# EAGLE board 12VAttinyDischargeChecker-A2 (EAGLE 8.5.2)

Size 100.33 x 70 mm. Coordinates in mm from the lower left corner, seen from the top.
Outline: 0,69.85 0,0 100.33,0 100.33,69.85
Outline: 0,69.85 0,70
Outline: 0,69.85 100,69.85
Copper layers (1*16): Top 0.035mm / dielectric 1.5mm / Bottom 0.035mm
Design rules "default": minimum track width 10mil, minimum drill 24mil, track to track 8mil, track to pad 8mil, pad to pad 8mil, via to via 8mil, smd to smd 8mil, copper to edge 40mil, drill to drill 8mil, minimum pad ring 10mil, minimum via ring 8mil, stop-mask expansion 4mil, vias tented up to drill 0mil, thermal gap 10mil

## Footprints (pad centres in the part's own frame; a part is rotated, then mirrored left to right if it is on the bottom)
0204/7 = drill 0.813 octagon: 1 -3.81,0; 2 3.81,0
DIL08 = drill 0.813 long: 1 -3.81,-3.81; 2 -1.27,-3.81; 3 1.27,-3.81; 4 3.81,-3.81; 5 3.81,3.81; 6 1.27,3.81; 7 -1.27,3.81; 8 -3.81,3.81
DIL28-3 = drill 0.813 long: 1 -16.51,-3.81; 2 -13.97,-3.81; 3 -11.43,-3.81; 4 -8.89,-3.81; 5 -6.35,-3.81; 6 -3.81,-3.81; 7 -1.27,-3.81; 8 1.27,-3.81; 9 3.81,-3.81; 10 6.35,-3.81; 11 8.89,-3.81; 12 11.43,-3.81; 13 13.97,-3.81; 14 16.51,-3.81; 15 16.51,3.81; 16 13.97,3.81; 17 11.43,3.81; 18 8.89,3.81; 19 6.35,3.81; 20 3.81,3.81; 21 1.27,3.81; 22 -1.27,3.81; 23 -3.81,3.81; 24 -6.35,3.81; 25 -8.89,3.81; 26 -11.43,3.81; 27 -13.97,3.81; 28 -16.51,3.81
MA04-1 = drill 1.016 long: 1 -3.81,0; 2 -1.27,0; 3 1.27,0; 4 3.81,0
TO92- = drill 0.813 long: 1 2.54,0; 2 0,0; 3 -2.54,0
1X01/90 = drill 1.016 long: 1 -1.27,-3.81
E5-8,5 = drill 1.016 pad 2.54: + -2.54,0 | drill 1.016 pad 2.54 octagon: - 2.54,0
MA06-1 = drill 1.016 long: 1 -6.35,0; 2 -3.81,0; 3 -1.27,0; 4 1.27,0; 5 3.81,0; 6 6.35,0
W237-132 = drill 1.194 long: 1 -2.54,-0.635; 2 2.54,-0.635
RS-2,5 = drill 0.813 pad 1.6 octagon: 1 -1.27,0; 2 1.27,0
2X02/90 = drill 1.016 octagon: 1 -1.27,-6.35; 2 -1.27,-3.81; 3 1.27,-6.35; 4 1.27,-3.81
WIRELESS-TX-FLAT = drill 0.8 long: P$1 0.635,-6.35; P$2 -1.905,-6.35; P$3 3.175,-6.35
P1-17Y = drill 1.702 pad 2.121 long: TP 0,0
MA03-1 = drill 1.016 long: 1 -2.54,0; 2 0,0; 3 2.54,0
PAK100/2500-10 = drill 1 pad 1.422: 1 -5.08,-1.27; 2 -5.08,1.27; 3 -2.54,-1.27; 4 -2.54,1.27; 5 0,-1.27; 6 0,1.27; 7 2.54,-1.27; 8 2.54,1.27; 9 5.08,-1.27; 10 5.08,1.27

## Placement (x,y rotation side)
E$1  [0204/7]  44.13,34.29 270 top
E$2  [DIL08]  6.35,5.71 270 top
E$3  [DIL28-3]  24.13,34.92 0 top
E$4  [DIL28-3]  24.13,48.26 0 top
E$5  [DIL28-3]  24.13,60.96 0 top
E$6  [DIL28-3]  77.47,60.96 180 top
E$7  [DIL28-3]  77.47,47.62 180 top
E$8  [MA04-1]  2.86,31.43 90 top
E$9  [MA04-1]  98.11,37.47 90 top
E$10  [0204/7]  47.94,34.29 270 top
E$11  [0204/7]  43.81,46.35 270 top
E$12  [0204/7]  47.62,46.35 270 top
E$13  [0204/7]  47.62,62.87 270 top
E$14  [0204/7]  43.81,62.87 270 top
E$15  [0204/7]  53.34,62.87 90 top
E$16  [0204/7]  57.15,62.87 90 top
E$17  [0204/7]  113.03,25.4 90 top  (outside the outline)
E$18  [TO92-]  104.14,55.88 90 top  (outside the outline)
E$19  [0204/7]  53.34,46.35 90 top
E$20  [0204/7]  57.15,46.35 90 top
E$21  [0204/7]  53.66,34.29 90 top
E$22  [1X01/90]  111.12,39.37 180 top  (outside the outline)
E$23  [E5-8,5]  106.05,25.4 270 top  (outside the outline)
E$24  [MA06-1]  2.96,44.87 90 top
E$25  [0204/7]  57.47,34.29 90 top
E$26  [MA04-1]  98.11,47.62 90 top
E$27  [DIL28-3]  77.47,34.92 180 top
E$28  [MA06-1]  117.58,15.98 90 top  (outside the outline)
E$29  [W237-132]  105.73,66.04 180 top
E$30  [RS-2,5]  113.03,50.8 90 top  (outside the outline)
E$31  [2X02/90]  108.78,51.77 180 top  (outside the outline)
E$32  [WIRELESS-TX-FLAT]  20.32,10.79 270 top
E$33  [P1-17Y]  33.97,26.04 0 top
E$34  [P1-17Y]  41.59,26.04 0 top
E$35  [MA04-1]  109.54,14.92 90 top  (outside the outline)
E$36  [P1-17Y]  33.97,8.26 0 top
E$37  [P1-17Y]  41.59,8.26 0 top
E$38  [MA06-1]  2.96,60.75 90 top
E$39  [P1-17Y]  45.09,26.04 0 top
E$40  [MA06-1]  98,60.54 270 top
E$41  [MA06-1]  103.72,44.03 270 top  (outside the outline)
E$42  [P1-17Y]  52.7,26.04 0 top
E$43  [P1-17Y]  45.09,8.26 0 top
E$44  [P1-17Y]  107.95,39.37 0 top  (outside the outline)
E$45  [P1-17Y]  52.7,8.26 0 top
E$46  [MA03-1]  38.1,3.49 0 top
E$47  [MA03-1]  48.9,3.49 0 top
E$48  [MA03-1]  60.01,3.17 0 top
E$49  [MA03-1]  71.12,3.49 0 top
E$50  [MA03-1]  81.92,3.17 0 top
E$51  [MA03-1]  93.03,3.49 0 top
E$52  [P1-17Y]  56.2,26.04 0 top
E$53  [P1-17Y]  63.82,26.04 0 top
E$54  [P1-17Y]  56.2,8.26 0 top
E$55  [P1-17Y]  63.82,8.26 0 top
E$56  [P1-17Y]  67.31,26.04 0 top
E$57  [P1-17Y]  74.93,26.04 0 top
E$58  [P1-17Y]  67.31,8.26 0 top
E$59  [P1-17Y]  74.93,8.26 0 top
E$60  [P1-17Y]  78.42,26.04 0 top
E$61  [PAK100/2500-10]  110.49,3.81 0 top  (outside the outline)
E$62  [P1-17Y]  86.04,26.04 0 top
E$63  [P1-17Y]  78.42,8.26 0 top
E$64  [P1-17Y]  86.04,8.26 0 top
E$65  [P1-17Y]  89.53,26.04 0 top
E$66  [P1-17Y]  97.16,26.04 0 top
E$67  [P1-17Y]  89.53,8.26 0 top
E$68  [P1-17Y]  97.16,8.26 0 top

## Library data of the parts
E$1 E$10-E$17 E$19-E$21 E$25 = eagle-ltspice
E$2-E$7 E$27 = 74xx-us
E$8 E$9 E$24 E$26 E$28 E$35 E$38 E$40 E$41 E$46-E$51 = con-lstb
E$18 = transistor-fet
E$22 E$31 = pinhead
E$23 = ref-packages-longpad
E$29 = con-wago-508
E$30 = discrete
E$32 = LSGPackages
E$33 E$34 E$36 E$37 E$39 E$42-E$45 E$52-E$60 E$62-E$68 = testpad
E$61 = con-3m

## Nets
S$2: E$1.1 E$2.4 E$3.22 E$8.4 E$12.1 E$32.P$3 E$36.TP E$46.1
S$3: E$2.5 E$32.P$2
S$4: E$1.2 E$3.13 E$10.2
S$5: E$4.13 E$11.2 E$12.2
S$7: E$3.11 E$8.2
S$8: E$2.8 E$3.7 E$8.3 E$32.P$1 E$34.TP
S$9: E$3.12 E$8.1
S$10: E$10.1 E$37.TP E$46.3
S$12: E$4.7 E$24.1 E$53.TP
S$13: E$4.11 E$24.3
S$14: E$4.12 E$24.4
S$15: E$5.7 E$38.1
S$17: E$5.11 E$38.2
S$19: E$5.13 E$13.2 E$14.2
S$20: E$6.13 E$15.2 E$16.2
S$21: E$7.13 E$19.2 E$20.2
S$22: E$21.2 E$25.2 E$27.13
S$23: E$4.22 E$11.1 E$13.1 E$24.6
S$24: E$5.22 E$14.1 E$15.1 E$38.6
S$25: E$6.22 E$16.1 E$19.1 E$40.6
S$26: E$7.22 E$20.1 E$21.1 E$26.1 E$55.TP
S$27: E$5.12 E$38.4
S$28: E$6.7 E$40.1
S$30: E$6.11 E$40.3
S$31: E$6.12 E$40.5
S$32: E$7.7 E$26.4
S$34: E$7.11 E$26.3
S$35: E$7.12 E$26.2
S$36: E$9.4 E$27.7
S$37: E$9.1 E$25.1 E$27.22 E$54.TP
S$38: E$9.3 E$27.11
S$39: E$9.2 E$27.12

## Tracks (layer width: path | path; a pad name or v marks a point on that pad's centre or on a via)
S$2  (7 unrouted)
S$3  (1 unrouted)
S$4  (2 unrouted)
S$5  (2 unrouted)
S$7  (1 unrouted)
S$8  (4 unrouted)
S$9  (1 unrouted)
S$10  (2 unrouted)
S$12  (2 unrouted)
S$13  (1 unrouted)
S$14  (1 unrouted)
S$15  (1 unrouted)
S$17  (1 unrouted)
S$19  (2 unrouted)
S$20  (2 unrouted)
S$21  (2 unrouted)
S$22  (2 unrouted)
S$23  (3 unrouted)
S$24  (3 unrouted)
S$25  (3 unrouted)
S$26  (4 unrouted)
S$27  (1 unrouted)
S$28  (1 unrouted)
S$30  (1 unrouted)
S$31  (1 unrouted)
S$32  (1 unrouted)
S$34  (1 unrouted)
S$35  (1 unrouted)
S$36  (1 unrouted)
S$37  (3 unrouted)
S$38  (1 unrouted)
S$39  (1 unrouted)

## Text on the board
bTest: 42v | 56v | - | - | 42v | 28v | 56v | 70v | - | 28v | 14v | - | 70v | 84v | - | - | 14v | 0v | Out+ | In+ | In+ | In+ | Coordinator | In- | In+ | Vi | V | A | M | Bi | B | G | R